# Altium PCB PCB1.PcbDoc
Units mm, origin at the board's own origin, x right, y up, seen from the top; angles counter-clockwise.
Board outline 152.4 x 101.6 mm, 2 copper layers (Top Layer, Bottom Layer); 14 components, 9 nets, 30 pads, 3 vias.
Unrouted connection lines stored in the file: 1.
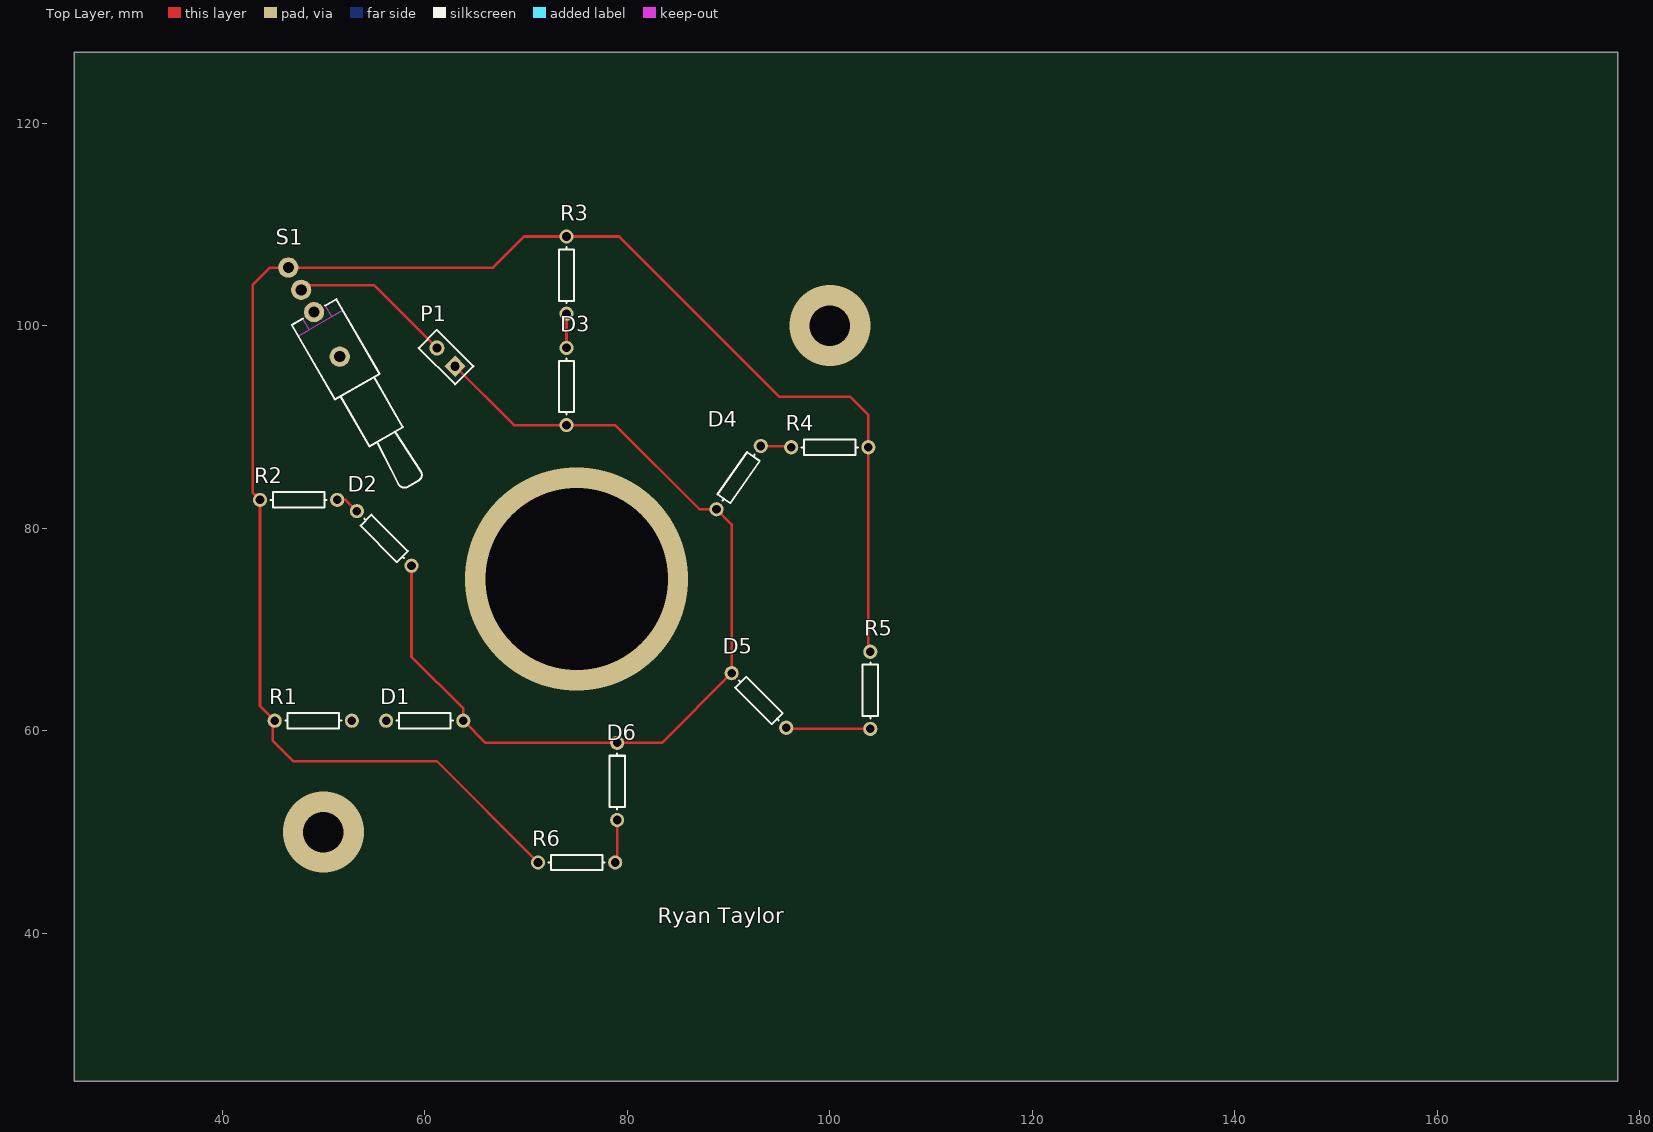
[diagram p0: Top Layer view]
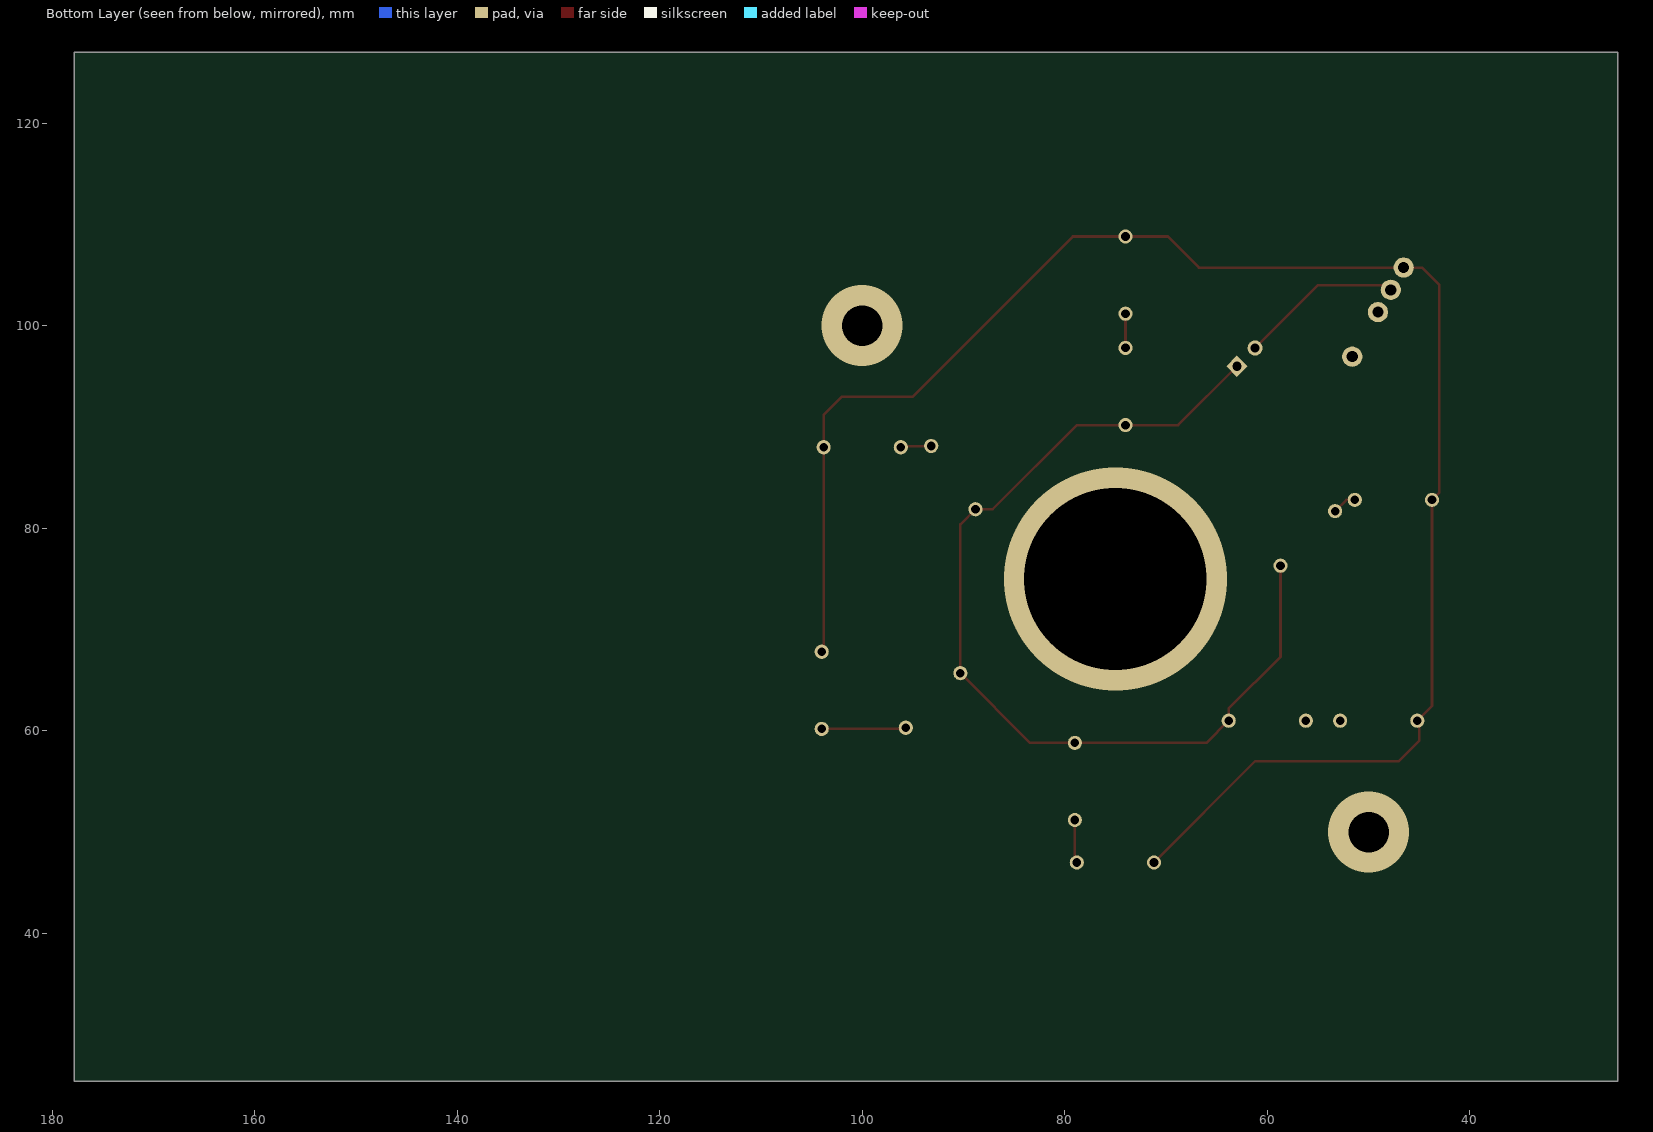
[diagram p1: Bottom Layer view, seen from below]

## Layer stack, top to bottom
Top Solder: solder mask 0.0102, Solder Resist, Dk 3.5
Top Layer: signal copper 0.0356
Dielectric 1: dielectric 0.32, FR-4, Dk 4.8
Bottom Layer: signal copper 0.0356
Bottom Solder: solder mask 0.0102, Solder Resist, Dk 3.5

## Board outline
25.4,25.4 177.8,25.4 177.8,127 25.4,127

## Design rules (kind name [scope] priority, off if disabled: settings)
Clearance [All] p1: gap=0.254
PolygonConnect [All] p1: connectstyle=Relief reliefconductorwidth=0.254 reliefentries=4 polygonreliefangle="90 Angle" airgapwidth=0.254
RoomDefinition Sheet1 [InComponentClass('Sheet1')] p1: confinementstyle=ConfineIn formatcopy=TRUE lockcomponents=FALSE outline 35,115 115,115 115,35 35,35
RoutingVias [All] p1: holewidth=0.711 width=1.27 viastyle="Through Hole" minholewidth=0.711 minwidth=1.27 maxholewidth=0.711 maxwidth=1.27
SolderMaskExpansion [All] p1: expansion=0.102
Width [All] p1: maxlimit=0.254 minlimit=0.254 preferedwidth=0.254
30 further rules are at their usual default settings.

## Components (designator, comment, footprint, x,y, rotation, side; value= is the part's Value field where it differs from the comment)
D1 "LED2" AXIAL-0.3 60,61 r0 top
D2 "LED2" AXIAL-0.3 56,79 r315 top
D3 "LED2" AXIAL-0.3 74,94 r270 top
D4 "LED2" AXIAL-0.3 91,85 r235 top
D5 "LED2" AXIAL-0.3 93,63 r135 top
D6 "LED2" AXIAL-0.3 79,55 r90 top
P1 "Header 2" HDR1X2 63,96 r135 top
R1 "Res1" AXIAL-0.3 49,61 r180 top
R2 "Res1" AXIAL-0.3 47.55,82.804 r180 top
R3 "Res1" AXIAL-0.3 74,105 r90 top
R4 "Res1" AXIAL-0.3 100,88 r0 top
R5 "Res1" AXIAL-0.3 104,64 r90 top
R6 "Res1" AXIAL-0.3 75,47 r180 top
S1 "SW-SPDT" TL36WW15050 49.074,101.346 r300 top

## Footprints (in the part's own frame and the unit in brackets; to place one, negate y for a bottom-side part, rotate by r counter-clockwise, add the part's x,y. Pads: shape width x height; smd on the part's side, far side on the other; paste and mask are expansions set on the pad)
AXIAL-0.3 [mm] "Axial Device, Thru-Hole; 2 Leads; 0.3 in Pin Spacing"
  round 1.4 hole 0.85: 1(-3.81,0) 2(3.81,0)
  silkscreen extent -2.77,-0.76 2.77,0.76
HDR1X2 [mm] "Connector; Header; 2 Position"
  rect 1.5x1.5 hole 0.9: 1(0,0)
  round 1.5 hole 0.9: 2(2.54,0)
  silkscreen extent -1.27,-1.27 3.81,1.27
TL36WW15050 [mm] "Switch; 4 Leads"
  round 2 hole 1.1: 1(0,0) 2(-2.54,0) 3(-5.08,0) M(5.08,0)
  Top Layer keep-out region: 0,-1.27 0,-2.54 1.27,-2.54 1.27,-1.27
  Top Layer keep-out region: 0,2.54 0,1.27 1.27,1.27 1.27,2.54
  Top Layer keep-out region: 1.27,2.54 1.27,-2.54 8.509,-2.54 8.509,2.54
  silkscreen extent 0,-2.54 19.56,2.54

## Part data
D1 D2 D3 D4 D5 D6: "Typical RED, GREEN, YELLOW, AMBER GaAs LED"
P1: "Header, 2-Pin"
R1 R2 R3 R4 R5 R6: "Resistor"
S1: "SPDT Subminiature Toggle Switch, Right Angle Mounting, Vertical Actuation"

## Via types
v1: diameter 8, hole 4, Top Layer to Bottom Layer, 2 vias
v2: diameter 22, hole 18, Top Layer to Bottom Layer, 1 vias

## Nets (pads, with @x,y where several pads share a name; then routed paths per layer and width w, separated by ;. In a path a pad name is that pad's centre, name@x,y a point inside that pad or via, vN(x,y) a via of type N, cw(c..) or ccw(c..) an arc to the next point about the centre after c; other vN are vias at no path point)
NetD1_1: D1.1 R1.1
NetD1_2: D1.2 D2.2 D3.2 D4.2 D5.2 D6.2 P1.1 | length 96.1
  Top Layer w0.254: D2.2 58.694,67.306 63.81,62.19 D1.2 66,58.81 D6.2 83.422,58.81 D5.2 90.306,80.388 D4.2 87.121,81.879 78.81,90.19 D3.2 68.81,90.19 P1.1
NetD2_1: D2.1 R2.1 | length 2.4
  Top Layer w0.254: R2.1 52.196,82.804 D2.1
NetD3_1: D3.1 R3.1 | length 3.4
  Top Layer w0.254: D3.1 R3.1
NetD4_1: D4.1 R4.1 | length 3.2
  Top Layer w0.254: D4.1@93.306,88 D4.1 96.069,88.121 R4.1
NetD5_1: D5.1 R5.1 | length 8.2
  Top Layer w0.254: D5.1@95.81,60.19 R5.1
NetD6_1: D6.1 R6.1 | length 4.3
  Top Layer w0.254: R6.1 79,47.19 D6.1
NetP1_2: P1.2 S1.2 | length 16.2
  Top Layer w0.254: S1.2 48.258,104 55,104 P1.2
NetR1_2: R1.2 R2.2 R3.2 R4.2 R5.2 R6.2 S1.3 | length 170.2
  Top Layer w0.254: R1.2@45,60.81 45,59 47,57 61.19,57 R6.2 ; R1.2 43.74,62.45 R2.2 43,83.544 43,104 44.745,105.745 S1.3 66.745,105.745 69.81,108.81 R3.2 79.19,108.81 95,93 102,93 103.81,91.19 R4.2 R5.2@103.81,68
pads on no net: S1.1 S1.M
copper on no net:
  other v1: 50,50 100,100
  other v2: 75,75

## Silkscreen, mask and mechanical layers (free items; w line width, h text height)
Top Overlay:
  text "Ryan Taylor" at 83,41 h1.52